# Altium PCB GrainDryer.PcbDoc
Units mm, origin at the board's own origin, x right, y up, seen from the top; angles counter-clockwise.
Board outline 156.17 x 82 mm, 2 copper layers (Top Layer, Bottom Layer); 64 components, 46 nets, 236 pads, 0 vias.
Unrouted connection lines stored in the file: 123.
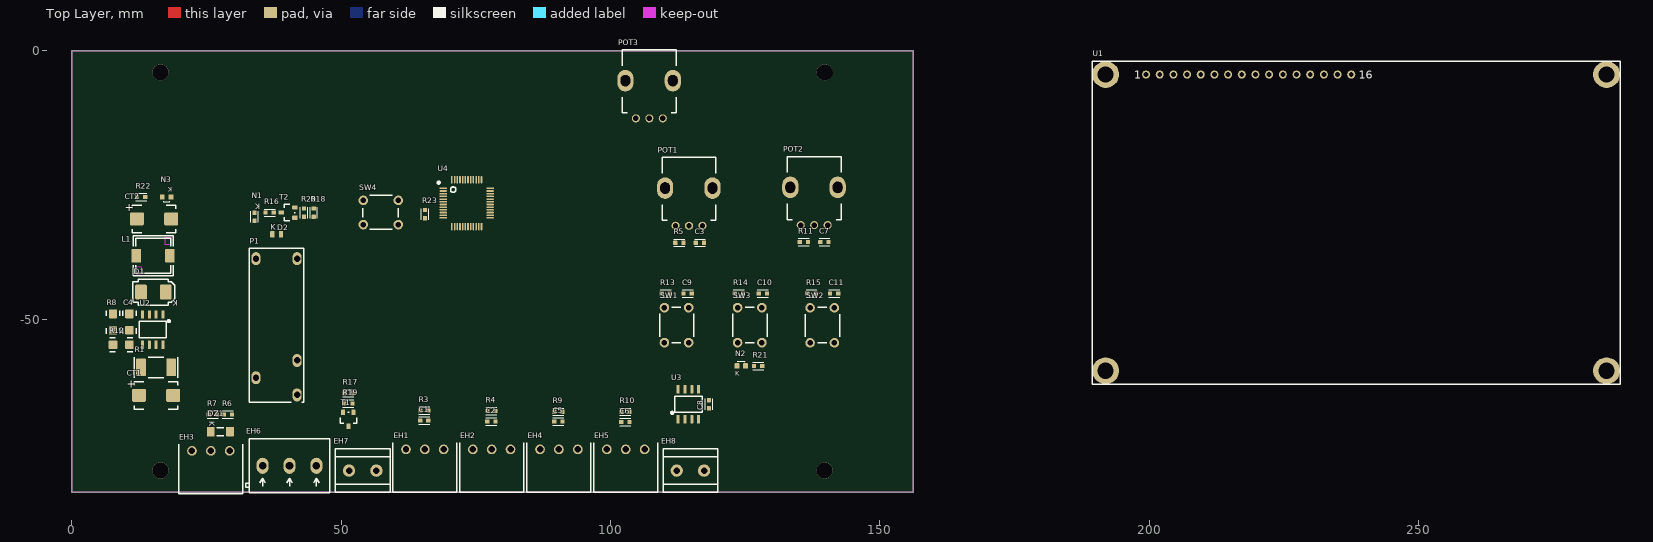
[diagram p0: Top Layer view]
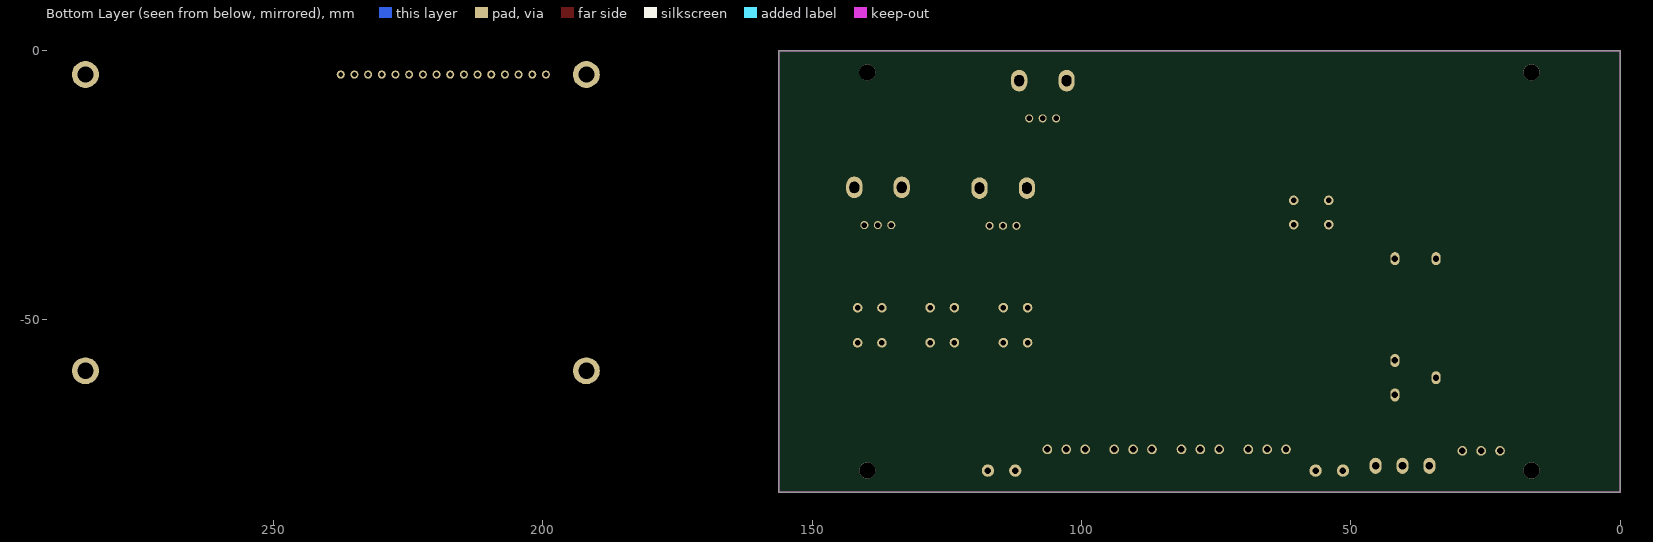
[diagram p1: Bottom Layer view, seen from below]

## Layer stack, top to bottom
Top Solder: solder mask 0.0102, Solder Resist, Dk 3.5
Top Layer: signal copper 0.0356
Dielectric 1: dielectric 0.32, FR-4, Dk 4.8
Bottom Layer: signal copper 0.0356
Bottom Solder: solder mask 0.0102, Solder Resist, Dk 3.5

## Board outline
0,-82.001 0,-0.001 156.175,-0.001 156.175,-82.001

## Design rules (kind name [scope] priority, off if disabled: settings)
Clearance [All] p1: gap=0.254 ignorepadtopadclearanceinfootprint=FALSE except(0: Arc-Hole Track-Hole SMDPad-Hole THPad-Hole Via-Hole Fill-Hole Poly-Hole Region-Hole Text-Hole)
PolygonConnect [All] p1: connectstyle=Relief reliefconductorwidth=0.254 reliefentries=4 polygonreliefangle="90 Angle" airgapwidth=0.254
RoomDefinition GrainDryer [InComponentClass('GrainDryer')] p1: confinementstyle=ConfineIn formatcopy=TRUE lockcomponents=FALSE outline -16.637,-91.059 415.544,-91.059 415.544,123.063 -16.637,123.063
RoutingVias [All] p1: holewidth=0.711 width=1.27 viastyle="Through Hole" minholewidth=0.711 minwidth=1.27 maxholewidth=0.711 maxwidth=1.27
SolderMaskExpansion [All] p1: expansion=0.102 istentingtop=FALSE
Width [All] p1: maxlimit=0.254 minlimit=0.254 preferedwidth=0.254
30 further rules are at their usual default settings.

## Components (designator, comment, footprint, x,y, rotation, side; value= is the part's Value field where it differs from the comment)
C1 "100n_50V" 0603C 64.643,-68.707 r0 top
C2 "100n_50V" 0603C 77.089,-68.834 r0 top
C3 "100n_50V" 0603C 115.824,-35.687 r0 top
C4 "470p_50V" 1206C 10.668,-51.943 r90 top
C5 "100n_50V" 0603C 89.535,-68.885 r0 top
C6 "100n_50V" 0603C 101.981,-68.961 r0 top
C7 "100n_50V" 0603C 138.938,-35.56 r0 top
C8 "100n_50V" 0603C 118.237,-66.421 r90 top
C9 "100n_50V" 0603C 113.538,-45.085 r0 top
C10 "100n_50V" 0603C 127.508,-45.085 r0 top
C11 "100n_50V" 0603C 140.716,-45.085 r0 top
CT1 "100u_20V" 7243 12.446,-64.008 r0 top
CT2 "100u_10V" 7243 12.065,-31.242 r0 top
D1 "MBRS1100T" CASE403A-03 17.399,-44.831 r270 top
D2 "BAS386" MICROMELF 37.211,-34.123 r0 top
DZ1 "BZV55-C5V1" SOD80D 25.781,-70.739 r0 top
EH1 "MC 1,5/3-G-3,5" "MC 1,5/3-G-3,5" 62.014,-74.041 r0 top
EH2 "MC 1,5/3-G-3,5" "MC 1,5/3-G-3,5" 74.422,-74.041 r0 top
EH3 "MC 1,5/3-G-3,5" "MC 1,5/3-G-3,5" 22.278,-74.308 r0 top
EH4 "MC 1,5/3-G-3,5" "MC 1,5/3-G-3,5" 86.898,-74.041 r0 top
EH5 "MC 1,5/3-G-3,5" "MC 1,5/3-G-3,5" 99.307,-74.041 r0 top
EH6 "DG128-5.0-03P14" DG128-5.0-03P14 45.386,-77.089 r0 top
EH7 "MKDSN 1,5/2-5,08" 2xMKDSN1.5 51.435,-77.978 r0 top
EH8 "MKDSN 1,5/2-5,08" 2xMKDSN1.5 112.268,-77.978 r0 top
L1 "220uH" SRR0604 12.065,-38.1 r0 top
N1 "LTST-C191KGKT" LED0603GREEN 33.909,-30.099 r270 top
N2 "KPA-1606ZGC" LED1606GREEN 123.444,-58.547 r0 top
N3 "KPA-1606ZGC" LED1606GREEN 18.364,-27.178 r180 top
P1 "RY610005" RY6100XX 34.163,-38.631 r90 top
POT1 "5k" "RK09 vertical" 114.549,-32.527 r270 top
POT2 "5k" "RK09 vertical" 137.79,-32.4 r270 top
POT3 "5k" "RK09 vertical" 107.183,-12.588 r270 top
R1 "0R33" 2512R 12.827,-58.801 r0 top
R3 "10k" 0603R 66.167,-66.802 r180 top
R4 "10k" 0603R 78.613,-66.929 r180 top
R5 "10R" 0603R 112.014,-35.687 r0 top
R6 "1k" 0603R 29.718,-67.564 r180 top
R7 "10R" 0603R 25.4,-67.564 r0 top
R8 "3k6" 1206R 7.62,-51.943 r90 top
R9 "10k" 0603R 91.059,-67.056 r180 top
R10 "10k" 0603R 103.505,-67.056 r180 top
R11 "10R" 0603R 135.128,-35.56 r0 top
R12 "1k2" 1206R 10.668,-54.61 r180 top
R13 "10k" 0603R 109.474,-45.085 r0 top
R14 "10k" 0603R 123.063,-45.085 r0 top
R15 "10k" 0603R 136.525,-45.085 r0 top
R16 "1k" 0603R 35.943,-30.099 r0 top
R17 "10R" 0603R 50.546,-63.627 r0 top
R18 "10R" 0603R 44.882,-29.337 r270 top
R19 "10k" 0603R 52.07,-65.532 r180 top
R20 "10k" 0603R 43.053,-30.861 r90 top
R21 "510R" 0603R 126.619,-58.547 r0 top
R22 "510R" 0603R 13.589,-27.178 r180 top
R23 "10k" 0603R 65.532,-31.115 r90 top
SW1 "6x6x13" SW6x6x13 109.982,-54.229 r90 top
SW2 "6x6x13" SW6x6x13 137.033,-54.252 r90 top
SW3 "6x6x13" SW6x6x13 123.571,-54.229 r90 top
SW4 "6x6x13" SW6x6x13 60.579,-32.313 r180 top
T1 "IRLML0040TRPBF" SOT23 52.248,-67.183 r180 top
T2 "IRLML0040TRPBF" SOT23 41.402,-31.039 r90 top
U1 "DEM16216SYH-LY" LCD2004 199.39,-4.445 r0 top
U2 "MC34063ABD" so8 16.891,-49.022 r180 top
U3 "MAX6675" SO8 112.522,-68.453 r0 top
U4 "STM32F030C6T6" LQFP48(0.5) 73.279,-28.321 r0 top

## Footprints (in the part's own frame and the unit in brackets; to place one, negate y for a bottom-side part, rotate by r counter-clockwise, add the part's x,y. Pads: shape width x height; smd on the part's side, far side on the other; paste and mask are expansions set on the pad)
2xMKDSN1.5 [mil]
  round 90 hole 47.24: 1(0,0) 2(200,0)
  silkscreen extent -100,-160 300,160, body extent -123,-158 299,160, height 394
0603C [mil]
  rrect20% 31.5x30 smd: 1(0,0) 2(60,0)
  silkscreen extent -10,-27 70,27, body extent -1,-16 62,16, height 12
0603R [mil]
  rrect20% 31.5x30 smd: 1(0,0) 2(60,0)
  silkscreen extent -10,-27 70,27, body extent -2,-16 61,16, height 12
1206C [mil]
  rrect20% 63x62 smd: 1(0,0) 2(120,0)
  silkscreen extent -25,-50 145,50, body extent -3,-31 123,32, height 39
1206R [mil]
  rrect20% 63x62 smd: 1(0,0) 2(120,0)
  silkscreen extent -25,-50 145,50, body extent -4,-31 122,32, height 39
2512R [mil]
  rrect20% 71x130 smd: 1(0,0) 2(220,0)
  silkscreen extent -50,-75 270,75, body extent -36,-63 256,63, height 28
7243 [mil]
  rrect20% 102x95 smd: 1(0,0) 2(250,0)
  silkscreen extent -35,-100 285,100, body extent -19,-85 268,85, height 111
CASE403A-03 [mil]
  rrect20% 108x85 smd: 1(0,0) 2(0,-180)
  silkscreen extent -95,-240 95,65, body extent -75,-189 75,0, height 91
DG128-5.0-03P14 [mm] "DEGSON"
  oval 2.2x3 hole 1.4: 1(0,0) 2(-5,0) 3(-10,0)
  silkscreen extent -13.15,-5 2.5,5, body extent -13.25,-4.6 2.5,5.2, height 13.81
LCD2004 [mm]
  round 1.5 hole 0.9: 1(0,0) 2(2.54,0) 3(5.08,0) 4(7.62,0) 5(10.16,0) 6(12.7,0) 7(15.24,0) 8(17.78,0) 9(20.32,0) 10(22.86,0) 11(25.4,0) 12(27.94,0) 13(30.48,0) 14(33.02,0) 15(35.56,0) 16(38.1,0)
  round 5 hole 3: M0(-7.5,-55) M0(-7.5,0) M0(85.5,-55) M0(85.5,0)
  silkscreen extent -10,-57.5 88,2.5, body extent -10,-57.5 88,2.5, height 13.3
LED0603GREEN [mil]
  rrect20% 31.5x30 smd: 1(0,0) 2(60,0)
  silkscreen extent -10,-27 70,27, body extent -3,-18 63,18, height 35
LED1606GREEN [mm] "LED SMD KҐTOWY 1.6mm x 0.6mm zielony"
  rrect20% 0.9x1 smd: 1(0,0) 2(1.6,0)
  silkscreen extent 0.19,0.82 1.41,0.9, body extent 0,-0.3 1.6,0.9, height 0.6
LQFP48(0.5) [mm]
  oval 1.4x0.3 smd: 1(-4.35,2.75) 2(-4.35,2.25) 3(-4.35,1.75) 4(-4.35,1.25) 5(-4.35,0.75) 6(-4.35,0.25) 7(-4.35,-0.25) 8(-4.35,-0.75) 9(-4.35,-1.25) 10(-4.35,-1.75) 11(-4.35,-2.25) 12(-4.35,-2.75) 25(4.35,-2.75) 26(4.35,-2.25) 27(4.35,-1.75) 28(4.35,-1.25) 29(4.35,-0.75) 30(4.35,-0.25) 31(4.35,0.25) 32(4.35,0.75) 33(4.35,1.25) 34(4.35,1.75) 35(4.35,2.25) 36(4.35,2.75)
  oval 0.3x1.4 smd: 13(-2.75,-4.35) 14(-2.25,-4.35) 15(-1.75,-4.35) 16(-1.25,-4.35) 17(-0.75,-4.35) 18(-0.25,-4.35) 19(0.25,-4.35) 20(0.75,-4.35) 21(1.25,-4.35) 22(1.75,-4.35) 23(2.25,-4.35) 24(2.75,-4.35) 37(2.75,4.35) 38(2.25,4.35) 39(1.75,4.35) 40(1.25,4.35) 41(0.75,4.35) 42(0.25,4.35) 43(-0.25,4.35) 44(-0.75,4.35) 45(-1.25,4.35) 46(-1.75,4.35) 47(-2.25,4.35) 48(-2.75,4.35)
  silkscreen extent -5.4,2 -2,4, body extent -4.5,-4.5 4.5,4.5, height 1.56
"MC 1,5/3-G-3,5" [mm]
  round 1.8 hole 1.2: 1(0,0) 2(3.5,0) 3(7,0)
  silkscreen extent -2.45,-8 9.45,1.2, body extent -2.45,-8 9.45,1.2, height 7.27
MICROMELF [mm] "2mm x 1.2mm"
  rrect30% 0.8x1.2 smd: 1(0,0) 2(1.6,0)
  body extent -0.3,-0.6 1.9,0.6, height 1.2
"RK09 vertical" [mm] "Potentiometer R9011 10mm x 12mm"
  round 1.5 hole 1: 1(0,-2.5) 2(0,0) 3(0,2.5)
  oval 4x3 hole 1.8 slot 2.1 at 0 deg: M1(-7,4.36) M1(-7,-4.44)
  silkscreen extent -12.7,-5 -1,5, body extent -12.5,-5.61 0.3,5.61, height 25
RY6100XX [mm]
  oval 2.4x1.7 hole 1.2: 11(-22.1,0) 12(-18.9,-7.62) 14(-25.3,-7.62) A1(0,0) A2(0,-7.62)
  silkscreen extent -26.68,-8.91 1.9,1.25, body extent -26.63,-8.88 1.87,1.23, height 12.31
so8 [mil]
  rrect20% 22x60 smd: 1(0,0) 2(50,0) 3(100,0) 4(150,0) 5(150,220) 6(100,220) 7(50,220) 8(0,220)
  silkscreen extent -51,39 175,170, body extent -20,-4 169,224, height 71
SO8 [mil]
  rrect20% 22x60 smd: 1(0,0) 2(50,0) 3(100,0) 4(150,0) 5(150,220) 6(100,220) 7(50,220) 8(0,220)
  silkscreen extent -51,39 175,170, body extent -20,-4 169,224, height 71
SOD80D [mm]
  rrect10% 1.4x1.8 smd: 1(0,0) 2(3.556,0)
  silkscreen extent 1.14,-0.76 2.41,0.76, body extent -0.1,-0.8 3.6,0.8, height 1.61
SOT23 [mil] "JEDEC TO 236"
  rrect20% 30x40 smd: 1(0,0) 2(75,0) 3(37,100)
  silkscreen extent -23,0 97,78, body extent -22,-12 96,112, height 39
SRR0604 [mm]
  rrect10% 1.75x2.5 smd: 1(-0.125,0) 2(6.125,0)
  Top Layer keep-out region: -0.35,-3.35 0.85,-3.35 0.85,-2.15 -0.35,-2.15
  Top Layer keep-out region: 6.342,3.351 5.142,3.351 5.142,2.151 6.342,2.151
  silkscreen extent -0.7,-3.7 6.7,3.7, body extent -0.28,-3.27 6.22,3.22, height 4.8
SW6x6x13 [mm]
  round 1.778 hole 1: 1(0,0) 1(6.5,0) 2(0,-4.5) 2(6.5,-4.5)
  silkscreen extent 0,-5.46 6.6,0.89, body extent -0.65,-5.29 7.25,0.71, height 13

## Part data
C1 C2 C3 C5 C6 C7 C8 C9 C10 C11: library part "100n 10% 50V 0603 [Metric: 1608] X7R", "Capacitor", Manufacturer=MULTICOMP, Manufacturer Part Number=MC0603B104K500CT, Tolerance=10, Voltage Rating=50, AE ERP=ZCS000046, Component Type=SMD, Pick and Place=100n_50V_MULTICOMP_MC0603B104K500CT
C4: library part "470p 5% 50V 1206 [Metric: 3216]", "Capacitor", Manufacturer=KEMET, Manufacturer Part Number=C1206C471J5GAC7800, Tolerance=5, Voltage Rating=50, AE ERP=ZCS000038, Component Type=SMD, Pick and Place=470p_50V_KEMET_C1206C471J5GAC7800
CT1: library part "100u 10% 20V 2917 [Metric: 7343] 0R085", "Tantalum Capacitor", Manufacturer=AVX, Manufacturer Part Number=TPSD107K020R0085, Component Type=SMD, Pick and Place=100u_20V_AVX_TPSD107K020R0085
CT2: library part "100u 10% 10V 2917 [Metric: 7343] 0R065", "Tantalum Capacitor", Manufacturer=AVX, Manufacturer Part Number=TPSD107K010R0065, Tolerance=10, AE ERP=ZCTS00014, Component Type=SMD, Pick and Place=100u_10V_AVX_TPSD107K010R0065, Voltage Rating=10
D1: library part "MBRS1100T3G 100V 1A SMB", "Schottky Diodes & Rectifiers", Manufacturer="ON SEMICONDUCTOR", Manufacturer Part Number=MBRS1100T3G, AE ERP=ZDS000019, Component Type=SMD, Pick and Place="ON SEMICONDUCTOR_MBRS1100T3G"
D2: library part "BAS386-TR 50V 0,1A Micro MELF", "Schottky Diode", Manufacturer=VISHAY, Manufacturer Part Number=BAS386-TR, AE ERP=ZDS000055, Component Type=SMD, Pick and Place=VISHAY_BAS386-TR
DZ1: library part "BZV55-C5V1 5,1V 2uA 500mW SOD-80", "Zener Diodes", Current=2u, Manufacturer=NXP, Power=0,5, Supplier Part Number 1=1097202, AE ERP=ZDS000064, Component Type=SMD, Manufacturer Part Number=BZV55-C5V1, Pick and Place=NXP_BZV55-C5V1, Supplier 1=Farnell
EH1 EH2 EH3 EH4 EH5: library part "MC 1,5/3-G-3,5 1844223", "Header 8A 250V", Manufacturer="PHOENIX CONTACT", Manufacturer Part Number=1844223, AE ERP=ZPH000303, Component Type=THT, Pick and Place="PHOENIX CONTACT_1844223"
EH6: "Term. block 5mm", Manufacturer="DEGSON ELECTRONICS", Manufacturer Part Number=DG128-5.0-03P-14-00A(H), AE ERP=ZE0000057, Component Type=THT, Pick and Place="DEGSON ELECTRONICS_DG128-5.0-03P-14-00A(H)"
EH7 EH8: library part "MKDSN 1,5/2-5,08 1729128", "Term. block 13,5A 250V", Manufacturer="PHOENIX CONTACT", Manufacturer Part Number=1729128, Component Type=THT, Pick and Place="PHOENIX CONTACT_1729128"
L1: library part "220uH 0,25A 6,5x6,5x4,8", "Power shielded 1R7", Manufacturer=BOURNS, Manufacturer Part Number=SRR0604-221KL, Maximum DC Current=0,25, Tolerance=10, AE ERP=ZLS000014, Component Type=SMD, Pick and Place=220uH_BOURNS_SRR0604-221KL
N1: library part "LTST-C191KGKT Green 0603 [Metric: 1608]", "LED SMD 12mcd", Colour=Green, Current=20m, Manufacturer=LITE-ON, AE ERP=ZNS000027, Component Type=SMD, Luminous Intensity=12, Manufacturer Part Number=LTST-C191KGKT, Pick and Place=LITE-ON_LTST-C191KGKT
N2 N3: library part "KPA-1606ZGC Green [Metric: 1606]", "LED SMD 400mcd", Colour=Green, Current=25m, Manufacturer=KINGBRIGHT, AE ERP=ZNS000019, Component Type=SMD, Luminous Intensity=400, Manufacturer Part Number=KPA-1606ZGC, Pick and Place=KINGBRIGHT_KPA-1606ZGC
P1: "General Purpose Relays SPDT 8 A 5VDC", Manufacturer=SCHRACK, Supplier Part Number 1=70225359, Component Type=THT, Manufacturer Part Number=RY610005, Supplier 1=Allied
POT1 POT2 POT3: library part "5k 20% 1/8W THT RK09", "Potentiometer", Manufacturer="SR PASSIVES", Manufacturer Part Number=R9011-1-5K, Power Rating=0,125, Tolerance=20, Component Type=THT, Pick and Place="5k_SR PASSIVES_R9011-1-5K"
R1: library part "0R33 5% 1W 2512 [Metric: 6432]", "Resistor", Manufacturer=YAGEO, Manufacturer Part Number=RL2512JK-070R02L, Power Rating=1, Tolerance=5, Component Type=SMD, Pick and Place=0R33_YAGEO_RL2512JK-070R02L
R3 R4 R9 R10 R13 R14 R15 R19 R20 R23: library part "10k 5% 0,1W 0603 [Metric: 1608]", "Resistor", Manufacturer=YAGEO, Manufacturer Part Number=RC0603JR-0710KL, Power Rating=0,1, Tolerance=5, AE ERP=ZRS000147, Component Type=SMD, Pick and Place=10k_YAGEO_RC0603JR-0710KL
R5 R7 R11 R17 R18: library part "10R 1% 0,1W 0603 [Metric: 1608]", "Resistor", Manufacturer=PANASONIC, Manufacturer Part Number=ERJ3EKF10R0V, Power Rating=0,1, Tolerance=1, AE ERP=ERJ3EKF10R0V, Component Type=SMD, Pick and Place=10R_PANASONIC_ERJ3EKF10R0V
R6 R16: library part "1k 5% 0,1W 0603 [Metric: 1608]", "Resistor", Manufacturer=YAGEO, Manufacturer Part Number=RC0603JR-071KL, Power Rating=0,1, Tolerance=5, AE ERP=ZRS000144, Component Type=SMD, Pick and Place=1k_YAGEO_RC0603JR-071KL
R8: library part "3k6 1% 0,25W 1206 [Metric: 3216]", "Resistor", Manufacturer=PANASONIC, Manufacturer Part Number=ERJ8ENF3601V, Power Rating=0,25, Tolerance=1, AE ERP=ZRS000025, Component Type=SMD, Pick and Place=3k6_PANASONIC_ERJ8ENF3601V
R12: library part "1k2 1% 0,25W 1206 [Metric: 3216]", "Resistor", Manufacturer="ROYAL OHM", Manufacturer Part Number=1206S4F0122T5E, Power Rating=0,25, Tolerance=1, Component Type=SMD, Pick and Place="1k2_ROYAL OHM_1206S4F0122T5E"
R21 R22: library part "510R 5% 0,1W 0603 [Metric: 1608]", "Resistor", Manufacturer=YAGEO, Manufacturer Part Number=RC0603JR-07510RL, Power Rating=0,1, Tolerance=5, AE ERP=ZRS000155, Component Type=SMD, Pick and Place=510R_YAGEO_RC0603JR-07510RL
SW1 SW2 SW3 SW4: library part SW6x6x13, "SW 6x6x13", Manufacturer=NINIGI, Manufacturer Part Number=TACT-613N-F, Component Type=THT, Pick and Place=NINIGI_TACT-613N-F
T1 T2: library part "IRLML0040TRPBF N 3,6A 40V SOT-23", "N-MOS 40V 3.6A 56mOhm 2.6nC Qg", Current=3,6, Manufacturer="INTERNATIONAL RECTIFIER", Component Type=SMD, Manufacturer Part Number=IRLML0040TRPBF, Pick and Place="INTERNATIONAL RECTIFIER_IRLML0040TRPBF"
U1: library part LCD2004, "LCD 4x20 93 x 55 mm 5V BL", Manufacturer="DISPLAY ELEKTRONIK", Component Type=THT, Manufacturer Part Number=DEM16216SYH-LY, Pick and Place="DISPLAY ELEKTRONIK_DEM16216SYH-LY"
U2: library part MC34063A, "DC-DC converter", Manufacturer=STMICROELECTRONICS, AE ERP=ZUS000391, Component Type=SMD, Manufacturer Part Number=MC34063ABD, Pick and Place=STMICROELECTRONICS_MC34063ABD
U3: "Cold-Junction-Compensated K-Thermocouple-to-Digital Converter", Manufacturer="Maxim Integrated", Component Type=SMD, Manufacturer Part Number=MAX6675, Pick and Place="Maxim Integrated_MAX6675"
U4: "Cortex M0, Flash 32k RAM 8k", Manufacturer=STMICROELECTRONICS, Component Type=SMD, Manufacturer Part Number=STM32F030C6T6, Pick and Place=STMICROELECTRONICS_STM32F030C6T6

## Free pads (board coordinates)
  round 3 hole 3: 1(16.44,-77.95) 1(16.44,-4.05) 1(139.731,-77.95) 1(139.74,-4.05)

## Nets (pads, with @x,y where several pads share a name; then routed paths per layer and width w, separated by ;. In a path a pad name is that pad's centre, name@x,y a point inside that pad or via, vN(x,y) a via of type N, cw(c..) or ccw(c..) an arc to the next point about the centre after c; other vN are vias at no path point)
5V: C1.1 C2.1 C5.1 C6.1 C8.1 CT2.1 EH1.1 EH2.1 EH3.1 EH4.1 EH5.1 L1.1 POT1.1 POT2.1 POT3.1 R3.2 R4.2 R6.1 R8.2 R9.2 R10.2 R13.1 R14.1 R15.1 R21.2 R22.2 R23.1 U1.2 U1.16 U3.4
12V: CT1.1 D2.1 EH7.2 N1.2 P1.A1 R1.1 U2.6
CS_Termopara: U3.7
DB4: U1.11
DB5: U1.12
DB6: U1.13
DB7: U1.14
EN: U1.6
gaz: R18.1
GND: C1.2 C2.2 C3.2 C4.1 C5.2 C6.2 C7.2 C8.2 C9.2 C10.2 C11.2 CT1.2 CT2.2 D1.2 DZ1.2 EH1.3 EH2.3 EH4.3 EH5.3 N3.1 POT1.3 POT2.3 POT3.3 R12.2 R19.2 R20.2 SW1.1 SW2.1 SW3.1 SW4.1 T1.2 T2.2 U1.1 U1.5 U1.15 U2.4 U3.1
MISO: U3.6
NetC4_2: C4.2 U2.3
NetD1_1: D1.1 L1.2 U2.2
NetD2_2: D2.2 P1.A2 R16.2 T2.3
NetDZ1_1: DZ1.1 EH3.2 R6.2 R7.2
NetEH6_1: EH6.1 P1.14
NetEH6_2: EH6.2 P1.11
NetEH6_3: EH6.3 P1.12
NetEH7_1: EH7.1 T1.3
NetEH8_1: EH8.1 U3.3
NetEH8_2: EH8.2 U3.2
NetN1_1: N1.1 R16.1
NetN2_2: N2.2 R21.1
NetN3_2: N3.2 R22.1
NetPOT1_2: POT1.2 R5.1
NetPOT2_2: POT2.2 R11.1
NetPOT3_2: POT3.2 U1.3
NetR1_2: R1.2 U2.1 U2.7 U2.8
NetR8_1: R8.1 R12.1 U2.5
NetR17_2: R17.2 R19.1 T1.1
NetR18_2: R18.2 R20.1 T2.1
NetR23_2: R23.2 SW4.2 U4.10
OneWire: R7.1
OnOffSyrena: C11.1 R15.2 SW3.2
rpmMieszadlo: EH4.2 R9.1
rpmSilnik: EH1.2 R3.1
rpmSlimak: EH2.2 R4.1
rpmWiatrak: EH5.2 R10.1
RS: U1.4
SCK: U3.8
Studzenie: C10.1 R14.2 SW2.2
Suszenie: C9.1 R13.2 SW1.2
Syrena: R17.1
SyrenaStatus: N2.1
Tstudzenia: C7.1 R11.2
Tsuszenia: C3.1 R5.2
pads on no net: EH3.3 POT1.M1 POT2.M1 POT3.M1 U1.7 U1.8 U1.9 U1.10 U1.M0 U3.5 U4.1 U4.2 U4.3 U4.4 U4.5 U4.6 U4.7 U4.8 U4.9 U4.11 U4.12 U4.13 U4.14 U4.15 U4.16 U4.17 U4.18 U4.19 U4.20 U4.21 U4.22 U4.23 U4.24 U4.25 U4.26 U4.27 U4.28 U4.29 U4.30 U4.31 U4.32 U4.33 U4.34 U4.35 U4.36 U4.37 U4.38 U4.39 U4.40 U4.41 U4.42 U4.43 U4.44 U4.45 U4.46 U4.47 U4.48

## Keep-outs
Keep-Out Layer:
  the board outline again, w0.254

## Text inside footprints (layer, text, board x,y; h text height)
CT1: Top Overlay "+" at 10.16,-62.611 h1.52
CT2: Top Overlay "+" at 9.779,-29.845 h1.52
D1: Top Overlay "K" at 19.685,-46.355 h1.02 r180
D2: Top Overlay "K" at 36.911,-33.223 h1.02
DZ1: Top Overlay "K" at 25.506,-68.839 h1.02 r270
N1: Top Overlay "K" at 34.984,-28.399 h1.02 r180
N2: Top Overlay "K" at 123.144,-60.347 h0.89
N3: Top Overlay "K" at 18.664,-25.378 h0.89 r180
U1: Top Overlay "1" at 197.19,-5.205 h1.52; Top Overlay "16" at 238.89,-5.245 h1.52